# Altium PCB DexCon.PcbDoc
Units mil, origin at the board's own origin, x right, y up, seen from the top; angles counter-clockwise.
Board outline 4450 x 2204.55 mil, 4 copper layers (Top Layer, Int1 (GND), Int2 (PWR), Bottom Layer), stack 53.912 mil thick; 50 components, 35 nets, 178 pads, 53 vias.
Unrouted connection lines stored in the file: 9.
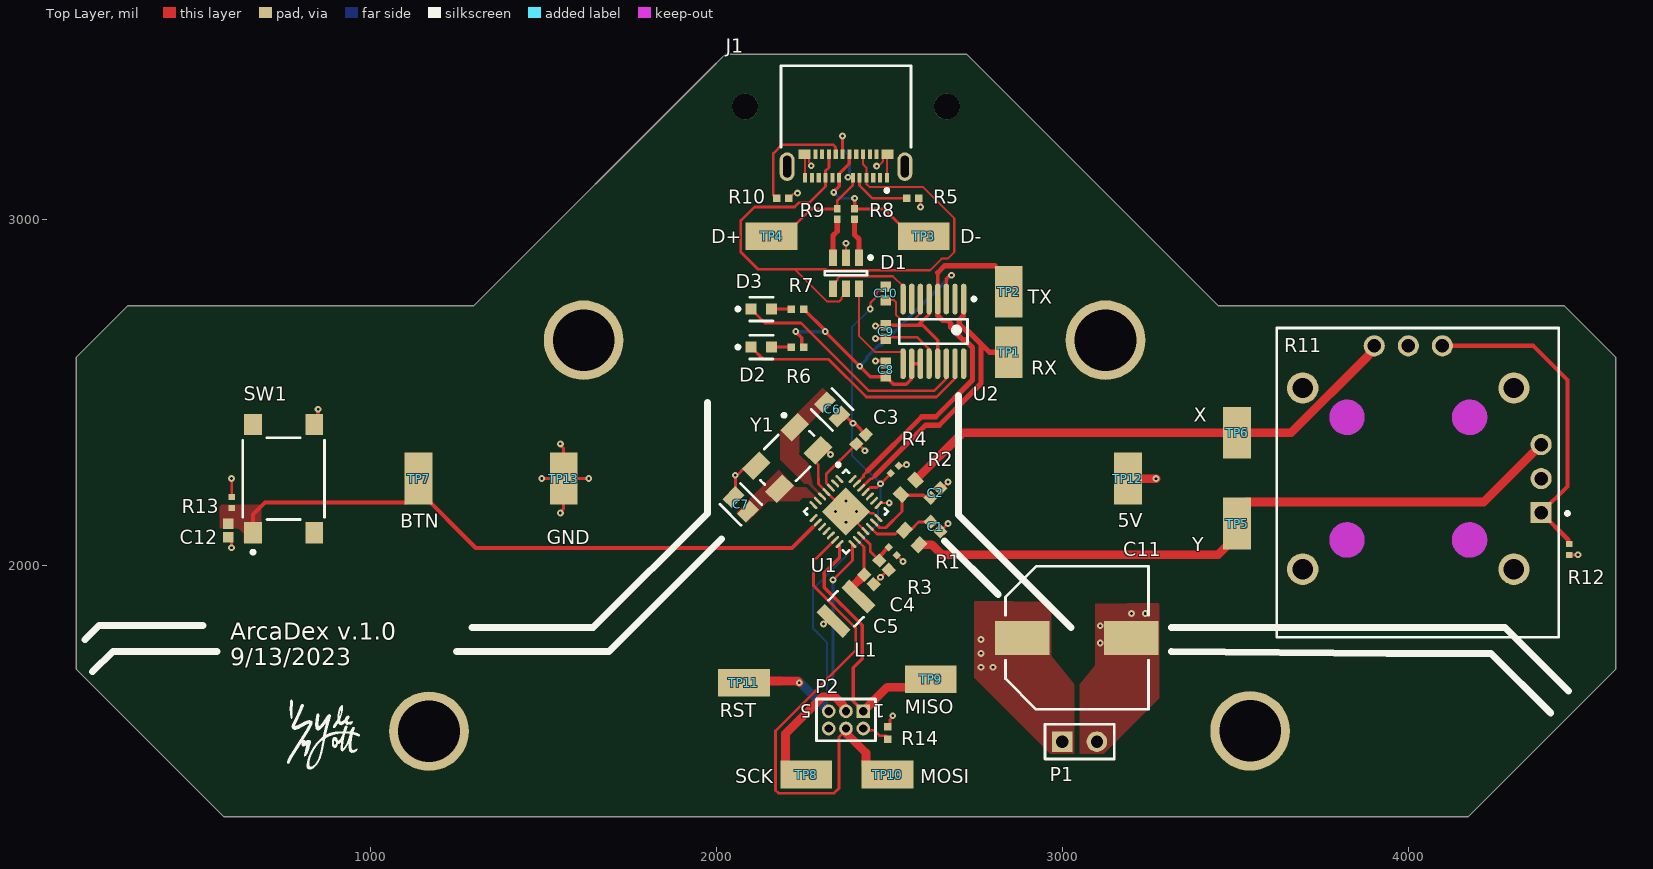
[diagram p0: Top Layer view]
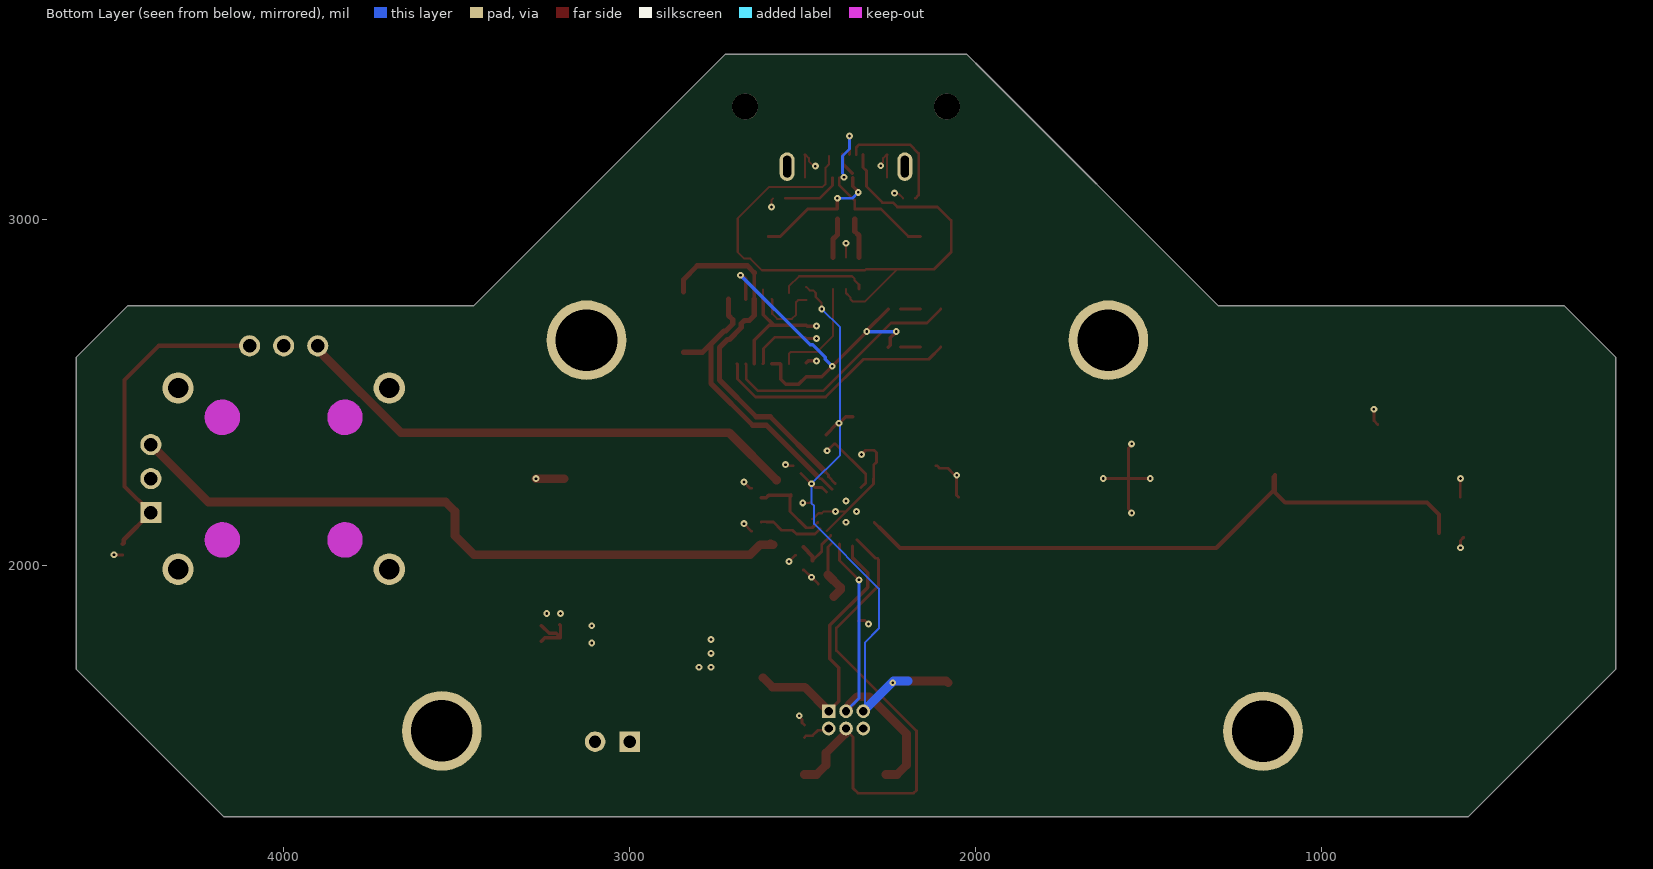
[diagram p1: Bottom Layer view, seen from below]
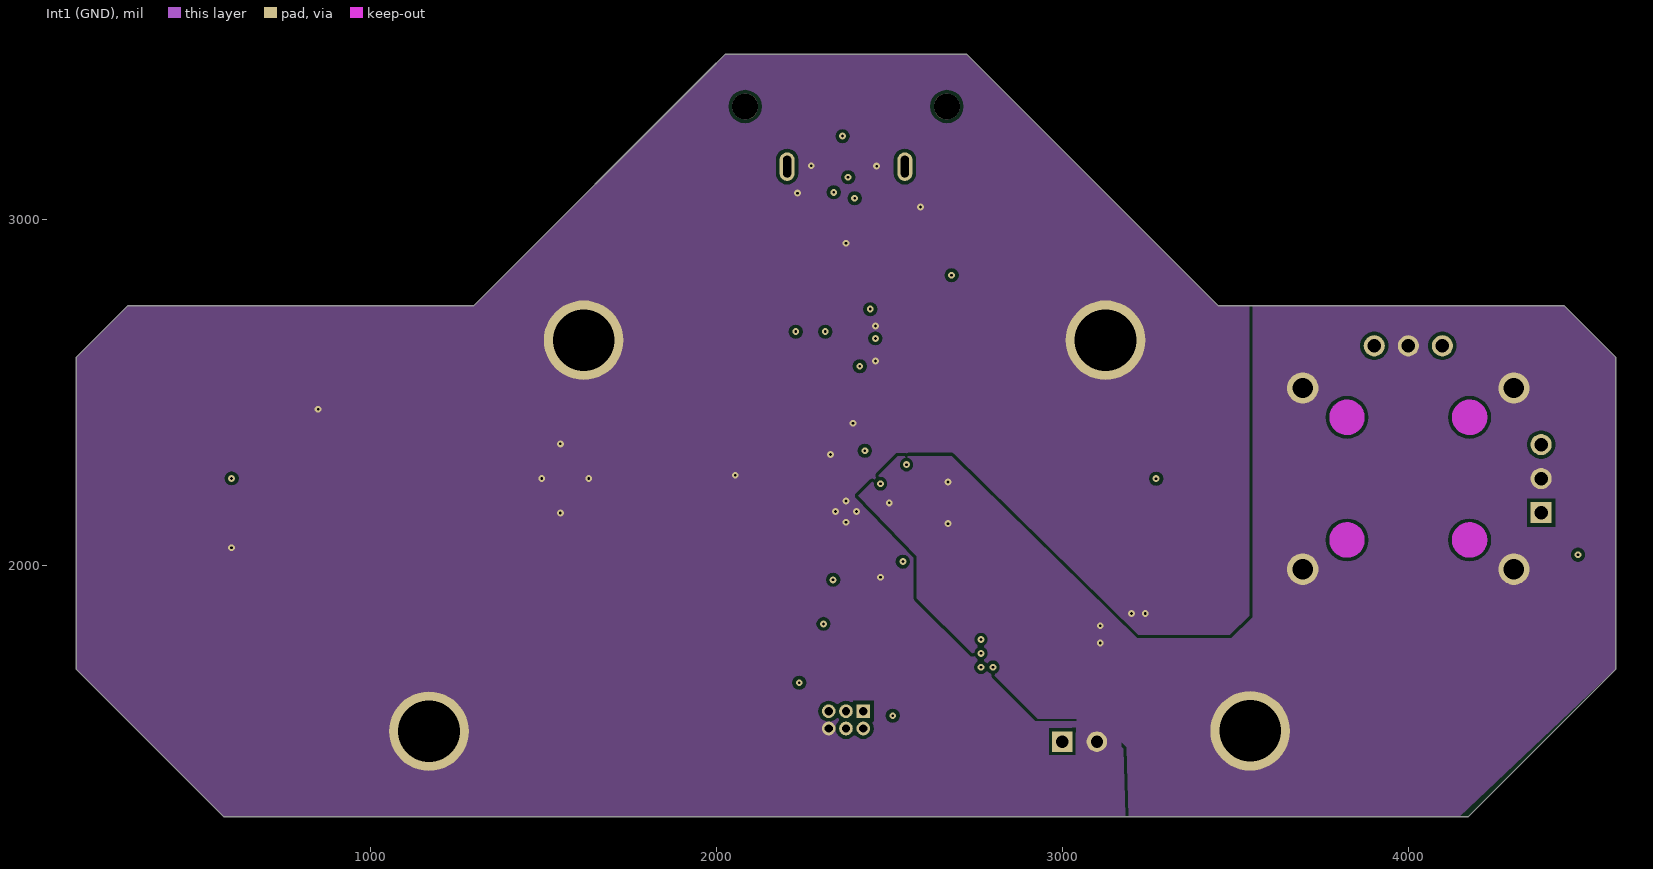
[diagram p2: Int1 (GND)]
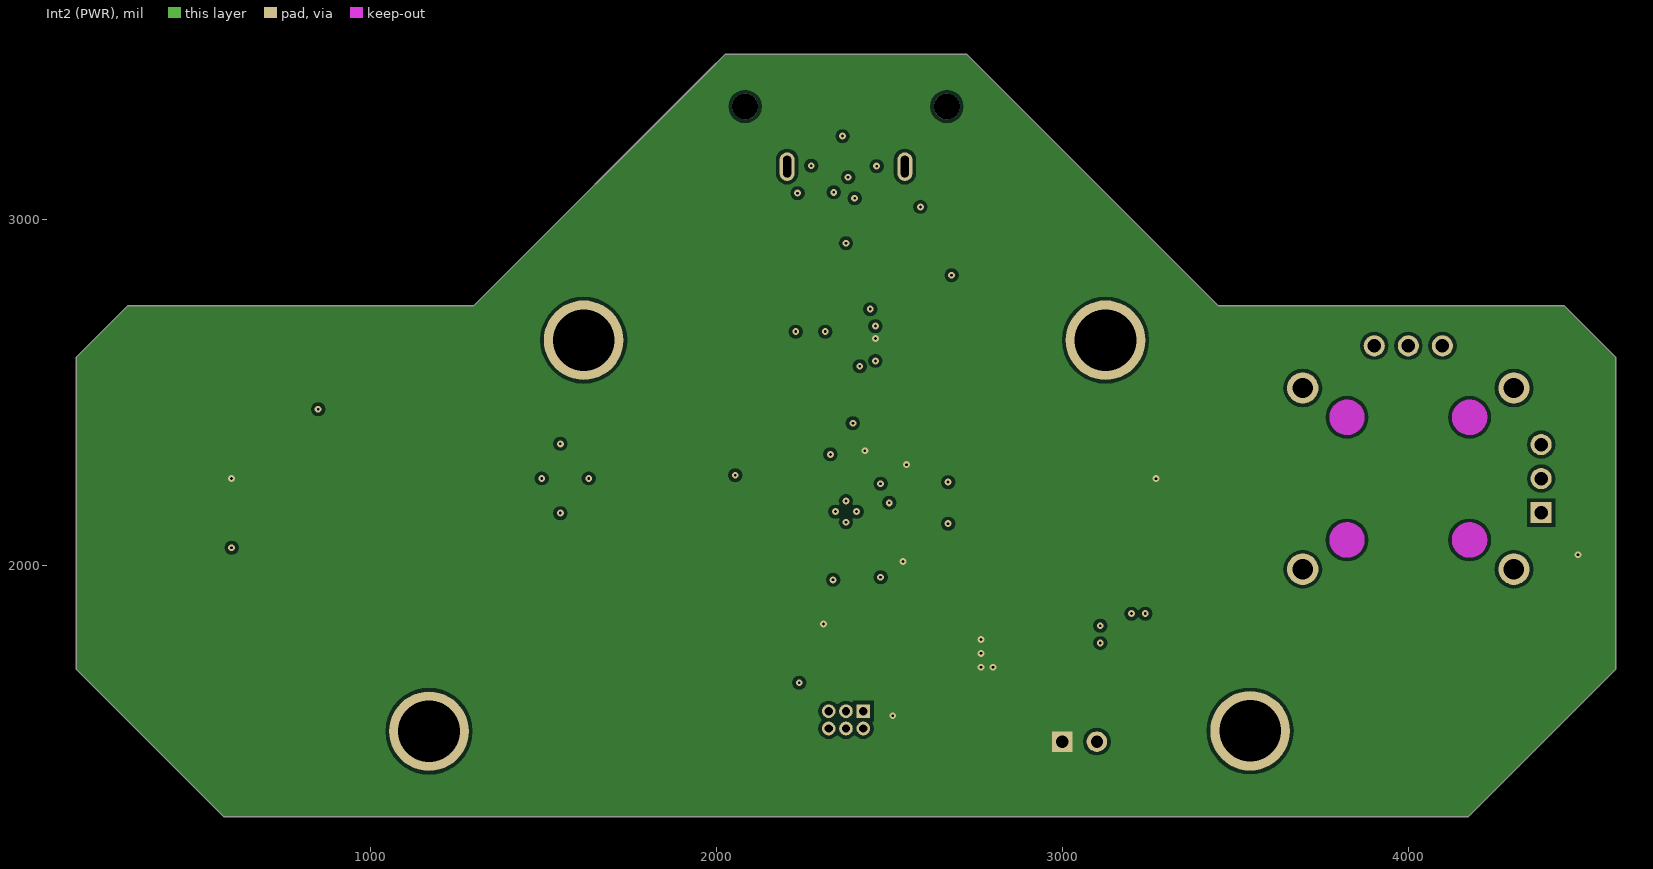
[diagram p3: Int2 (PWR)]

## Layer stack, top to bottom
Top Solder: solder mask 1, SM-001, Dk 4
Top Layer: signal copper 1.378
Dielectric 1: prepreg 5.1, PP-017, Dk 4.3
Dielectric 2: prepreg 5.1, PP-017, Dk 4.3
Int1 (GND): signal copper 1.378
Dielectric 3: core 28, Core-039, Dk 4.8
Int2 (PWR): signal copper 1.378
Dielectric 4: prepreg 5.1, PP-017, Dk 4.3
Dielectric 5: prepreg 5.1, PP-017, Dk 4.3
Bottom Layer: signal copper 1.378
Bottom Solder: solder mask 1, SM-001, Dk 4

## Board outline
150,1700.05 150,2600.05 300,2750.05 1300,2750.05 2000,3450.05 1999.5,3449.5 2027,3477 2723,3477 3450,2750 4450,2750 4600,2600 4600,1700 4172.45,1272.45 2375,1272.45 2375,1272.5 577.55,1272.5

## Design rules (kind name [scope] priority, off if disabled: settings)
Clearance [All] p1: gap=10 ignorepadtopadclearanceinfootprint=FALSE except(0: Arc-Hole Track-Hole SMDPad-Hole THPad-Hole Via-Hole Fill-Hole Poly-Hole Region-Hole Text-Hole)
DiffPairsRouting [All] p1: maxlimit=10 minlimit=10 mostfreqgap=10 toplayer_minwidth=8 toplayer_maxwidth=15 toplayer_prefwidth=15 midlayer1_minwidth=15 midlayer1_maxwidth=15 midlayer1_prefwidth=15 midlayer2_minwidth=15 midlayer2_maxwidth=15 midlayer2_prefwidth=15 bottomlayer_minwidth=8 bottomlayer_maxwidth=15 bottomlayer_prefwidth=15 maxuncoupledlength=500
PolygonConnect PolygonConnect_2 [All] p1: connectstyle=Direct reliefconductorwidth=10 reliefentries=4 polygonreliefangle="90 Angle" airgapwidth=10
PolygonConnect PolygonConnect_1 [All] p2: thpad.connectstyle=Direct thpad.reliefconductorwidth=10 thpad.reliefentries=4 thpad.polygonreliefangle="90 Angle" thpad.airgapwidth=10 smdpad.connectstyle=Direct smdpad.reliefconductorwidth=10 smdpad.reliefentries=4 smdpad.polygonreliefangle="90 Angle" smdpad.airgapwidth=10 via.connectstyle=Relief via.reliefconductorwidth=10 via.reliefentries=4 via.polygonreliefangle="90 Angle" via.airgapwidth=10
PolygonConnect [All] p3: connectstyle=Relief reliefconductorwidth=10 reliefentries=4 polygonreliefangle="90 Angle" airgapwidth=10
RoutingVias [All] p1: holewidth=28 width=50 viastyle="Through Hole" minholewidth=28 minwidth=50 maxholewidth=28 maxwidth=50
SolderMaskExpansion [All] p1: expansion=4 istentingtop=FALSE
Width [All] p1: maxlimit=200 minlimit=3.5 preferedwidth=10 midlayer1_minwidth=10 midlayer1_maxwidth=10 midlayer2_minwidth=10 midlayer2_maxwidth=10 minimp=50.000000 maximp=50.000000 favimp=50.000000
29 further rules are at their usual default settings.

## Classes and differential pairs
component class "PWR / IO": C11 C12 P1 R11 R12 R13 SW1 TP5 TP6 TP7 TP12 TP13
component class MCU: C1 C2 C3 C4 C5 C6 C7 L1 R1 R2 R3 R4 U1 Y1
component class INTERFACES: C8 C9 C10 D1 D2 D3 J1 P2 R5 R6 R7 R8 R9 R10 R14 TP1 TP2 TP3 TP4 TP8 TP9 TP10 TP11 U2
differential pair U: +U_P -U_N

## Components (designator, comment, footprint, x,y, rotation, side; value= is the part's Value field where it differs from the comment)
C1 "100nF" CAPC1005X56X25ML10T15 2633.64,2111.36 r315 top
C2 "100nF" CAPC1005X56X25ML10T15 2633.64,2208.64 r45 top
C3 "100nF" CAPC1005X56X25ML10T15 2418.64,2363.64 r225 top
C4 "100nF" CAPC1005X56X25ML10T15 2485,1999.77 r135 top
C5 "100nF" CAPC1005X56X25ML10T15 2441.36,1958.64 r315 top
C6 "C0805C220J5GACTU" FP-C0805C-DN-MFG 2335,2449.77 r315 top value="22 pF"
C7 "C0805C220J5GACTU" FP-C0805C-DN-MFG 2070.73,2175.65 r135 top value="22 pF"
C8 "100nF" CAPC1005X56X25ML10T15 2490,2565 r270 top
C9 "100nF" CAPC1005X56X25ML10T15 2490,2674 r270 top
C10 "100nF" CAPC1005X56X25ML10T15 2490,2785 r270 top
C11 "1000u" NIC-CAPA2-10X10_V 3042.52,1790 r0 top
C12 "100nF" CAPC1005X56X25ML10T15 590,2100 r270 top
D1 "USBLC6-2SC6" STM-SOT23-6L_V 2375,2843.5 r270 top
D2 "LTST-C190KGKT" FP-LTST-C190KGKT-MFG 2130.47,2630 r0 top
D3 "LTST-C190KGKT" FP-LTST-C190KGKT-MFG 2130.47,2740 r0 top
J1 "205714-1001" FP-205714-1001-MFG 2375,3276.08 r180 top
L1 "100uH" FP-CB3225-MFG 2375,1873.9 r45 top
P1 "Header 2" HDR1X2 3000,1490 r0 top
P2 "MHDR2X3" MHDR2X3 2425,1577.94 r180 top
R1 "1k" RESC1608X55X25ML10T15 2565,2079.77 r315 top
R2 "1k" RESC1608X55X25ML10T15 2555,2225 r45 top
R3 "10k" RESC1005X40X25LL05T05 2510,2040 r315 top
R4 "10k" RESC1005X40X25LL05T05 2516.14,2276.14 r225 top
R5 "5.11k" RESC1005X40X25NL05T05 2567.72,3060 r180 top
R6 "270" RESC1005X40X25NL05T05 2235,2630 r0 top
R7 "270" RESC1005X40X25NL05T05 2235,2740 r0 top
R8 "27" RESC1005X40X25LL10T10 2400,3014.76 r270 top
R9 "27" RESC1005X40X25LL10T10 2350,3014.76 r270 top
R10 "5.11k" RESC1005X40X25NL05T05 2192.28,3060 r180 top
R11 "RKJXK122000D" FP-RKJXK122000D-MFG 4000,2250 r0 top
R12 "10k" RESC1005X40X25LL05T05 4465,2045 r270 top
R13 "10k" RESC1005X40X25LL05T05 600,2180.75 r90 top
R14 "270" RESC1005X40X25NL05T05 2495,1515 r270 top
SW1 "PTS645SM43SMTR92LFS" FP-PTS645SM43SMTR92LFS-MFG 750,2250 r90 top
TP1 "5019" KSTN-5019_V 2845,2615 r270 top
TP2 "5019" KSTN-5019_V 2845,2790 r270 top
TP3 "5019" KSTN-5019_V 2600,2950 r0 top
TP4 "5019" KSTN-5019_V 2160,2950 r180 top
TP5 "5019" KSTN-5019_V 3505,2120 r90 top
TP6 "5019" KSTN-5019_V 3505,2382.28 r90 top
TP7 "5019" KSTN-5019_V 1139.86,2250 r90 top
TP8 "5019" KSTN-5019_V 2260,1395 r0 top
TP9 "5019" KSTN-5019_V 2620,1670 r0 top
TP10 "5019" KSTN-5019_V 2495,1395 r180 top
TP11 "5019" KSTN-5019_V 2080,1660 r180 top
TP12 "5019" KSTN-5019_V 3189.78,2250 r90 top
TP13 "5019" KSTN-5019_V 1559.06,2250 r90 top
U1 "ATmega328P-MMH" 28M1_N 2375,2154.77 r315 top
U2 "FT230XS-U" SSOP-16_N 2627.5,2675.5 r270 top
Y1 "ABM3B-16.000MHZ-10-1-U-T" FP-ABM3B-MFG 2205,2309.77 r225 top

## Footprints (in the part's own frame and the unit in brackets; to place one, negate y for a bottom-side part, rotate by r counter-clockwise, add the part's x,y. Pads: shape width x height; smd on the part's side, far side on the other; paste and mask are expansions set on the pad)
28M1_N [mm] "QFN, 28-Leads, Body 4x4mm, Pitch 0.45mm, Thermal Pad 2.5x2.5mm, IPC Medium Density"
  oval 0.75x0.2 smd: 1(-2.025,1.35) 2(-2.025,0.9) 3(-2.025,0.45) 4(-2.025,0) 5(-2.025,-0.45) 6(-2.025,-0.9) 7(-2.025,-1.35) 15(2.025,-1.35) 16(2.025,-0.9) 17(2.025,-0.45) 18(2.025,0) 19(2.025,0.45) 20(2.025,0.9) 21(2.025,1.35)
  oval 0.2x0.75 smd: 8(-1.35,-2.025) 9(-0.9,-2.025) 10(-0.45,-2.025) 11(0,-2.025) 12(0.45,-2.025) 13(0.9,-2.025) 14(1.35,-2.025) 22(1.35,2.025) 23(0.9,2.025) 24(0.45,2.025) 25(0,2.025) 26(-0.45,2.025) 27(-0.9,2.025) 28(-1.35,2.025)
  rect 2.5x2.5 smd: 29(0,0)
  silkscreen extent -2.95,-2.18 2.18,2.18, body extent -2.02,-2.02 2.02,2.02, height 1
CAPC1005X56X25ML10T15 [mm] "Chip Capacitor, 2-Leads, Body 1.00x0.50mm, IPC Low Density"
  rect 0.78x0.74 smd: 1(-0.49,0) 2(0.49,0)
  body extent -0.55,-0.3 0.55,0.3, height 0.56
FP-205714-1001-MFG [mm]
  rrect100% 1.1x2.1 hole 1.6 slot 0.6 at 0 deg paste-1000 mask+0: 1(-4.32,3.16) 2(4.32,3.16)
  rect 0.3x0.7 smd paste+0 mask+0: A1(-3,3.97) A2(-2.5,3.97) A3(-2,3.97) A4(-1.5,3.97) A5(-1,3.97) A6(-0.5,3.97) A7(0.5,3.97) A8(1,3.97) A9(1.5,3.97) A10(2,3.97) A11(2.5,3.97) A12(3,3.97) B2(2.25,2.27) B3(1.75,2.27) B4(1.25,2.27) B5(0.75,2.27) B6(0.25,2.27) B7(-0.25,2.27) B8(-0.75,2.27) B9(-1.25,2.27) B10(-1.75,2.27) B11(-2.25,2.27)
  rect 0.9x0.7 smd paste+0 mask+0: B1(3.05,2.27) B12(-3.05,2.27)
  round 1.9 hole 1.9 unplated paste-1000 mask+0: ""(-7.4,-1.25) ""(7.4,-1.25)
  silkscreen extent -4.77,-4.25 4.77,5.03, body extent -9,-4.35 9,4.42, height 0.25
FP-ABM3B-MFG [mm]
  rect 1.8x1.2 smd paste+0 mask+0: 1(-2,-1.2) 2(2,-1.2) 3(2,1.2) 4(-2,1.2)
  silkscreen extent -2.55,-2.5 2.55,1.65, body extent -3,-1.9 3,1.9, height 0.25
FP-C0805C-DN-MFG [mm]
  rect 0.95x1.35 smd paste+0 mask+0: 1(-0.75,0) 2(0.75,0)
  silkscreen extent -1.1,-1.07 1.1,1.07, body extent -1.4,-0.85 1.4,0.85, height 0.25
FP-CB3225-MFG [mm]
  rect 0.85x2.7 smd paste+0 mask+0: 1(-1.275,0) 2(1.275,0)
  silkscreen extent -0.47,-1.35 0.47,1.35, body extent -1.8,-1.45 1.8,1.45, height 0.25
FP-LTST-C190KGKT-MFG [mm]
  rect 0.8x0.8 smd paste+0 mask+0: 1(-0.75,0) 2(0.75,0)
  silkscreen extent -1.85,-0.87 0.85,0.87, body extent -1.25,-0.55 1.25,0.55, height 0.25
FP-PTS645SM43SMTR92LFS-MFG [mm]
  rect 1.55x1.3 smd paste+0 mask+0: 1(-3.975,2.25) 2(3.975,2.25) 3(-3.975,-2.25) 4(3.975,-2.25)
  silkscreen extent -5.52,-3 3,3, body extent -4.85,-3.1 4.85,3.1, height 0.25
FP-RKJXK122000D-MFG [mm]
  round 2.3 hole 1.5 paste-1000 mask+0: 1(-7.75,6.65) 2(7.75,6.65) 3(-7.75,-6.65) 4(7.75,-6.65)
  rect 1.55x1.55 hole 1 paste-1000 mask+0: 1_VR1(9.75,-2.5)
  round 1.55 hole 1 paste-1000 mask+0: 1_VR2(2.5,9.75) 2_VR1(9.75,0) 2_VR2(0,9.75) 3_VR1(9.75,2.5) 3_VR2(-2.5,9.75)
  Keep-Out Layer circle w1.3: c4.5,4.5 r0.65
  Keep-Out Layer circle w1.3: c4.5,-4.5 r0.65
  Keep-Out Layer circle w1.3: c-4.5,4.5 r0.65
  Keep-Out Layer circle w1.3: c-4.5,-4.5 r0.65
  silkscreen extent -9.65,-11.65 11.8,11.05, body extent -9.75,-11.75 11.15,11.15, height 0.25
HDR1X2 [mm] "Connector; Header; 2 Position"
  rect 1.5x1.5 hole 0.9: 1(0,0)
  round 1.5 hole 0.9: 2(2.54,0)
  silkscreen extent -1.27,-1.27 3.81,1.27
KSTN-5019_V [mm] "Test Point, 1-Leads, Body 3.81x2.03mm"
  rect 3.8x2.03 smd: 1(0,0)
  body extent -1.9,-1.01 1.9,1.02, height 2.29
MHDR2X3 [mm] "Connector; Header; 3x2 Position"
  rect 1x1 hole 0.6: 1(0,0)
  round 1 hole 0.6: 2(0,1.27) 3(1.27,0) 4(1.27,1.27) 5(2.54,0) 6(2.54,1.27)
  silkscreen extent -0.9,-0.9 3.44,2.17
NIC-CAPA2-10X10_V [mm] "Aluminum Electrolytic Capacitor, Diameter 10mm, Height 10.8mm, Pitch 8mm"
  rect 4x2.5 smd: 1(-4,0) 2(4,0)
  silkscreen extent -5.25,-5.25 5.25,5.25, body extent -4.96,-4.99 5,4.99, height 10.8
RESC1005X40X25LL05T05 [mm] "Chip Resistor, 2-Leads, Body 1.05x0.55mm, IPC High Density"
  rect 0.45x0.45 smd: 1(-0.4,0) 2(0.4,0)
  body extent -0.53,-0.28 0.53,0.28, height 0.4
RESC1005X40X25LL10T10 [mm] "Chip Resistor, 2-Leads, Body 1.00x0.50mm, IPC High Density"
  rect 0.55x0.5 smd: 1(-0.375,0) 2(0.375,0)
  body extent -0.55,-0.3 0.55,0.3, height 0.4
RESC1005X40X25NL05T05 [mm] "Chip Resistor, 2-Leads, Body 1.00x0.50mm, IPC Medium Density"
  rect 0.55x0.55 smd: 1(-0.45,0) 2(0.45,0)
  body extent -0.53,-0.27 0.53,0.28, height 0.4
RESC1608X55X25ML10T15 [mm] "Chip Resistor, 2-Leads, Body 1.60x0.80mm, IPC Low Density"
  rect 0.8x1 smd: 1(-0.75,0) 2(0.75,0)
  body extent -0.85,-0.45 0.85,0.45, height 0.55
SSOP-16_N [mm] "SOP, 16-Leads, Body 4.9x3.9mm, Pitch 0.635mm, IPC Medium Density"
  oval 2.25x0.4 smd: 1(-2.375,2.222) 2(-2.375,1.587) 3(-2.375,0.952) 4(-2.375,0.317) 5(-2.375,-0.318) 6(-2.375,-0.953) 7(-2.375,-1.588) 8(-2.375,-2.223) 9(2.375,-2.222) 10(2.375,-1.587) 11(2.375,-0.952) 12(2.375,-0.317) 13(2.375,0.318) 14(2.375,0.953) 15(2.375,1.588) 16(2.375,2.223)
  silkscreen extent -2.5,-2.5 0.9,3.1, body extent -1.99,-2.5 1.99,2.5, height 1.76
STM-SOT23-6L_V [mm] "SOT23, 6-Leads, Body 3.05x1.75mm, Pitch 0.95mm"
  rect 1.2x0.6 smd: 1(-1.15,0.95) 2(-1.15,0) 3(-1.15,-0.95) 4(1.15,-0.95) 5(1.15,0) 6(1.15,0.95)
  silkscreen extent -1.27,-1.55 0.15,1.93, body extent -1.6,-1.53 1.6,1.53, height 1.45

## Part data
C1 C2 C3 C4 C5 C8 C9 C10 C12: library part CMP-1034-02071-2, Manufacturer="AVX Interconnect / Elco", Part Number=0402YG104ZAT2A
C6 C7: library part CMP-2007-00048-2, "Capacitor; Ceramic; Cap; 22.0pF; Tol 5%; SMT; Vol-Rtg 50V; C0G; Tape and Reel", Capacitance="22 pF", Manufacturer=KEMET, Package=C0805C-DN, Temperature="-55°C to +125°C", Temperature Characteristic=C0G, Temperature Coefficient=30ppm/°C, Temperature Range High=+125°C, Temperature Range Low=-55°C, Tolerance=0.05, Voltage Rating="50 V", Automotive=No, Category=Cap, ComponentLink2Description=Datasheet, ComponentLink2URL=https://content.kemet.com/datasheets/KEM_C1003_C0G_SMD.pdf, Device Class L1="Passive Components", Device Class L2=Capacitors, Device Class L3="Ceramic Capacitors", Digikey Description="Capacitor; Ceramic; Cap; 22.0pF; Tol 5%; SMT; Vol-Rtg 50V; C0G; Tape and Reel", Height=0.88mm, Ipc Land Pattern Name=CAPC200125X78, Lead Free=Yes, Manufacturer Part Number=C0805C220J5GACTU, Material=Ceramic, Mouser Description="Multilayer Ceramic Capacitors MLCC - SMD/SMT 50volts 22pF C0G 5%", Octopart=https://octopart.com/c0805c220j5gactu-kemet-145470, RoHS=TRUE
C11: library part CMP-0687-00006-1, "Aluminum Electrolytic Capacitor, UD Series, Low Impedance, 1000 uF, 10 V, + / - 20%, -55 to 105 degC, Chip Type, 10 x 10 mm D x L, Pb-Free, Reel", Manufacturer=Nichicon, PartNumber=UUD1A102MNL1GS, Rated Capacitance="1000 uF", Rated Ripple Current (at 100kHz)="670 mA", Rated Voltage="10 V", Tolerance Rated Capacitance="-20 to 20%", ComponentLink1Description="Manufacturer URL", ComponentLink1URL=http://www.nichicon.co.jp/, ComponentLink2Description=Datasheet, ComponentLink2URL=http://products.nichicon.co.jp/en/pdf/XJA043/e-ud.pdf, ComponentLink3Description="Package Specification", ComponentLink3URL=http://products.nichicon.co.jp/en/pdf/XJA043/e-ud.pdf, DatasheetVersion=08/2012, Diameter="10 mm", Endurance Time="5000 h", Impedance="0.09 Ohm", Length="10 mm", Mounting Technology="Surface Mount", PackageDescription="2-Pin Surface Mount Device, Diameter 10 mm, Height 10 mm, Pitch 8 mm", PackageReference=CAPAE-D10H10, Packing="Dia382mm Reel", RoHS=TRUE
D1: library part CMP-2000-05378-1, "Very low capacitance ESD protection, 3.5 pF, -40 to 125 degC, 6-Pin SOT23, RoHS, Tape and Reel", Capacitance Value=3.5pF, Clamping Voltage=17V, Leakage Current=0.15uA, Manufacturer=STMicroelectronics, Operating Temp Range=-40Cto125C, Operating Temperature Classification=Automotive, Operating Temperature Max Deg. C=125C, Operating Temperature Min Deg. C=-40C, Package / Case=SOT-23, Package Description="6-Pin Small Outline Transistor, Body 2.925 x 1.625 mm, Pitch 0.95 mm", Package Reference=SOT23-6L, Peak Pulse Current=5A, Reverse Breakdown Voltage=6V, Reverse Stand-off Voltage=5V, Test Current (It)=1mA, Clamping Voltage (Max)=17V, Configuration=Dual, Datasheet URL=http://www.st.com/st-web-ui/static/active/en/resource/technical/document/datasheet/CD00050750.pdf, Datasheet Version="Rev. 5, 10/2011", Direction Type=Uni-Directional, Leakage Current (Max)=0.15uA, Manufacturer URL=http://www.st.com/, Mounting=SurfaceMount, Mounting Style=SurfaceMount, Number of Elements=1, Packaging=TapeandReel, Pin Count=6, Polarity=Uni-Directional, Product Depth (mm)=1.75mm, Product Height (mm)=1.3mm, Product Length (mm)=3.05mm, Rad Hardened=No, Suppressor Type=DiodeArrays, Working Voltage=5V, Working Voltage (Max)=5V
D2 D3: library part CMP-2000-05197-2, "LED GREEN CLEAR CHIP SMD", Case Code (Imperial)=0603, Case Code (Metric)=1608, Color=Green, Forward Current=30mA, Forward Voltage=2V, Lens Color=Colorless, Max Operating Temperature=85°C, Min Operating Temperature=-55°C, Package Quantity=1, Power Dissipation=75mW, Reverse Voltage=5V, Test Current=20mA, Case/Package=0603, Depth=0.8mm, Dominant Wavelength=571nm, Height=0.8mm, Illumination Color=Green, Lead Free="Lead Free", Length=1.6mm, Lens Style=Diffused, Lens Transparency=Clear, Luminous Intensity=35mcd, Mount="Surface Mount", Number of Elements=1, Number of LEDs=1, Number of Pins=2, Packaging="Tape and Reel", Power Rating=75mW, Radiation Hardening=No, Viewing Angle=130°, Wavelength=574nm, Width=0.8mm
J1: library part CMP-04767-000031-1, "USB TYPE C WITH SCREW HOLE  GM"
L1: library part CMP-14484-000373-1, "SMD Inductors 100uH ±20% 0.34A 1.82Ω 1210", Case Code (Imperial)=1210, Case Code (Metric)=3225, Current Rating=340mA, DC Resistance (DCR)=1.82R, Inductance Tolerance=20%, Inductor Type=POWER, Max Operating Temperature=105°C, Min Operating Temperature=-40°C, Package Quantity=1000, Resistance=1.4R, Resistor Type=Wirewound, Saturation Current=270mA, Self Resonant Frequency=6MHz, Test Frequency=100kHz, Case/Package=1210, Core Material=Ferrite, DC Current=340mA, Depth=2.7mm, Halogen Free="Halogen Free", Height=2.5mm, Height - Seated (Max)=0.106inch, Inductance=100uH, Lead Free="Lead Free", Length=0.126inch, Max DC Current=340mA, Military Standard=Not, Mount="Surface Mount", Number of Pins=2, Packaging="Tape and Reel", Radiation Hardening=No, RoHS Compliant=Yes, Series=CB, Shielding=Unshielded, Termination=SMD/SMT, Tolerance=20%, Width=0.098inch
P1: "Header, 2-Pin", LatestRevisionDate=17-Jul-2002, LatestRevisionNote="Re-released for DXP Platform.", Publisher="Altium Limited"
P2: "Header, 3-Pin, Dual row", LatestRevisionDate=17-Jul-2002, LatestRevisionNote="Re-released for DXP Platform.", Publisher="Altium Limited"
R1 R2: library part CMP-2000-04525-1, Manufacturer=Yageo, Part Number=RT0603BRE071KL
R3 R4 R12 R13: library part CMP-2000-07588-1, "Chip Resistor, 10 KOhm, +/- 1%, 0.1 W, -55 to 155 degC, 0402 (1005 Metric), RoHS, Tape and Reel", Case Code (Imperial)=0402, Case Code (Metric)=1005, Manufacturer=Panasonic, Max Operating Temperature=155degC, Max Power Dissipation=100mW, Min Operating Temperature=-55degC, Package Description="2-Pin Surface Mount Device, Body 1 x 0.5 mm", Package Quantity=1, Package Reference=402, Resistance=10KOhm, Temperature Coefficient=100ppm\/degreesC, Tolerance=1%, Voltage Rating=50V, Case\/Package=0402, Composition=ThickFilm, Contact Plating=Tin, Datasheet URL=https://industrial.panasonic.com/cdbs/www-data/pdf/RDA0000/AOA0000C304.pdf, Datasheet Version=02/2017, Depth=0.5mm, Height=0.35mm, Lead Free=LeadFree, Length=1mm, Manufacturer URL=http://www.panasonic.com/, Military Standard=Not, Mount=SurfaceMount, Mounting Technology=SurfaceMount, Number of Pins=2, Number of Terminations=2, Packaging=TapeandReel, Power Rating=100mW, Radiation Hardening=No, REACH SVHC=NoSVHC, RoHSCompliant=True, Termination=SMD/SMT, Voltage Rating (DC)=50V, Width=0.02inch
R5 R10: library part CMP-2002-00974-1, Manufacturer=Panasonic, Part Number=ERJ-2RKF5111X
R6 R7 R14: library part CMP-1011-00444-2, Manufacturer=Panasonic, Part Number=ERJ2RKF2700X
R8 R9: library part CMP-2002-03638-1, Manufacturer="KOA Speer", Part Number=RK73B1ETTP270J
R11: library part CMP-24118-000003-1, "ALPS NAVIGATION SWITCH, RESISTIVE, PCB", Current Rating=50mA, Insulation Resistance=100MR, Max Operating Temperature=70°C, Min Operating Temperature=-10°C, Operating Force=5.2N, Package Quantity=10, Power Rating=12.5mW, Resistance=10kR, Resistor Type=Potentiometer, Depth=20.7mm, Height=12.9mm, Lead Free="Lead Free", Length=16mm, Life (Hours)=100Hour, Military Standard=Not, Mount="Through Hole", Packaging=Tray, Radiation Hardening=No, RoHS Compliant=Yes, Series="RKJXV/ RKJXK", Termination=Pin, Type=Potentiometer, Width=16mm
SW1: library part CMP-2000-05160-2, "SWITCH TACTILE SPST-NO 0.05A 12V", Case/Package=SMD/SMT, Color=Black, Contact Resistance=100mR, Current Rating=50mA, Max Operating Temperature=60°C, Max Voltage Rating (DC)=12V, Min Operating Temperature=-20°C, Operating Force=160gf, Package Quantity=1, Actuator Length=0.85mm, Actuator Material=Nylon, Actuator Type=Standard, Contact Material=Silver, Contact Plating=Silver, Depth=9mm, Illumination Type=Non-Illuminated, Lead Free="Lead Free", Length=6mm, Max Current Rating=50mA, Mechanical Life=100000Cycles, Mount="Surface Mount", Orientation=Straight, Packaging="Tape and Reel", REACH SVHC="No SVHC", Switch Function=Off-Mom, Termination="Gull Wing", Throw Configuration=SPST, Voltage Rating (DC)=12V
TP1 TP2 TP3 TP4 TP5 TP6 TP7 TP8 TP9 TP10 TP11 TP12 TP13: library part CMP-1672-00008-1, "Test Point, 1 Position SMD, RoHS, Tape and Reel", Package Quantity=1000, ComponentLink1Description="Manufacturer URL", ComponentLink1URL=http://www.keyelco.com/, ComponentLink2Description=Datasheet, ComponentLink2URL=http://www.keyelco.com/product-pdf.cfm?p=1357, Contact Plating=Silver, DatasheetVersion=03/2014, Mount="Surface Mount", Mounting Technology="Surface Mount", PackageDescription="1-Pin Surface Mount Device, Body 3.81 x 2.03 mm", PackageReference=5019, Packaging="Tape and Reel", Pins=1, RoHSCompliant=True
U1: library part CMP-0095-00378-1, "8-bit AVR Microcontroller, 32KB Flash, 1KB EEPROM, 2KB SRAM, 28-pin VQFN, Industrial Grade (-40°C to 85°C)", ComponentLink1Description="Manufacturer URL", ComponentLink1URL=http://www.atmel.com/, ComponentLink2Description="ATmega48A/48PA/88A/88PA/168A/168PA/328/328P Datasheet", ComponentLink2URL=http://www.atmel.com/dyn/resources/prod_documents/8271.pdf, ComponentLink3Description="ATmega48A/48PA/88A/88PA/168A/168PA/328/328P Summary", ComponentLink3URL=http://www.atmel.com/dyn/resources/prod_documents/8271S.pdf, DatasheetVersion="revD, May-2011", PackageDescription="28-pad, 4x4x1.0mm Body, Pitch 0.45mm, 2.4x2.4mm Exposed Pad, Plastic Very Thin QFN Package (VQFN)", PackageReference=28M1, PackageVersion="revB, Nov-2008"
U2: library part CMP-0248-00025-2, "USB to Basic UART Interface Chip, UHCI/OHCI/EHCI Compatible, USB 2.0 Compatible, -40 to +85 degC, 16-Pin SSOP, Pb-Free, Tube", Manufacturer=FTDI, Code_JEDEC=MO-137-AB, ComponentLink1Description="Manufacturer URL", ComponentLink1URL=http://www.ftdichip.com/, ComponentLink2Description=Datasheet, ComponentLink2URL=http://www.ftdichip.com/Support/Documents/DataSheets/ICs/DS_FT230X.pdf, ComponentLink3Description="FT230X Product Page", ComponentLink3URL=www.ftdichip.com/Products/ICs/FT230X.html, DatasheetVersion="ver 1.2, Feb-2013", PackageDescription="16-Pin Small Outline Package, 8.6 x 3.9 mm Body, 0.635 mm Pitch", PackageReference=SSOP-16, PackageVersion=Feb-13, PartNumber=FT230XS-U, RevisionNote="DatasheetVersion updated to 1.2 Feb-2013"
Y1: library part CMP-27762-009701-1, "Crystal 16MHz ±10ppm 10pF SMD-4 5mm x 3.2mm", Case/Package=CSMD, ESR (Equivalent Series Resistance)=50R, Frequency=16MHz, Frequency Stability=10ppm, Load Capacitance=10pF, Max Operating Temperature=60°C, Min Operating Temperature=-10°C, Operating Frequency="16 MHz", Package Quantity=1000, Resistor Type=Ceramic, Depth=3.2mm, Frequency Tolerance=10ppm, Height=0.043inch, Lead Free="Lead Free", Length=5mm, Mount="Surface Mount", Number of Pins=4, Packaging="Tape and Reel", REACH SVHC="No SVHC", Series=ABM3B, Series Resistance=50R, Termination=SMD/SMT, Tolerance=10ppm, Width=3.2mm

## Free pads (board coordinates)
  round 230 hole 178: 1(1170,1520) 1(1617,2650) 1(3125,2650) 1(3542.84,1521)

## Via types
v1: diameter 19.68, hole 7.87, Top Layer to Bottom Layer, 53 vias

## Nets (pads, with @x,y where several pads share a name; then routed paths per layer and width w, separated by ;. In a path a pad name is that pad's centre, name@x,y a point inside that pad or via, vN(x,y) a via of type N, cw(c..) or ccw(c..) an arc to the next point about the centre after c; other vN are vias at no path point)
3V3_IO: C8.2 R6.2 R7.2 U2.3 U2.10 U2.11 | length 1072.9
  Top Layer w10: v1(2230,2675) 2230,2673.65 2246.89,2656.76 2246.89,2635.83 R6.2 ; R7.2 2313.15,2679.57 2313.15,2676.85 v1(2315,2675) v1(2415,2575) 2445.08,2544.92 2490,2544.92 2512.22,2522.7 2549.47,2522.7 2563.9,2537.13 2563.9,2580.89 U2.10 U2.11 ; U2.3 2665,2827.33 2673.48,2835.8 2678.15,2835.8 v1(2680,2837.66)
  Bottom Layer w10: v1(2230,2675) v1(2315,2675) ; v1(2415,2575) 2435.16,2595.16 2435.16,2600.29 2471.18,2636.31 2478.65,2636.31 v1(2680,2837.66)
5V: C3.2 C9.2 C11.1 L1.1 P1.1 R3.2 R4.1 R12.2 R13.2 R14.1 TP12.1 U1.3 U2.12 | length 691.6
  Top Layer w8: v1(599.58,2250.42) 599.79,2250.21 599.79,2196.71 R13.2 ; v1(2310,1830) 2319.95,1839.95 2337.96,1839.95 L1.1 ; U1.3@2331.47,2223.98 2318.09,2237.37 2318.09,2263.09 C3.2 2410,2350 v1(2429.58,2330.42) ; v1(2460,2655) 2489.71,2655 C9.2 2493.57,2658.28 2581.21,2658.28 2613.52,2625.98 2613.52,2583.47 U2.12 ; R14.1@2495,1537.72 2501.83,1544.54 2501.83,1553.66 2510,1561.84 v1(2510,1565) ; R3.2 v1(2539.58,2010.42) ; R4.1 2543.27,2287.27 2546.42,2290.42 v1(2549.58,2290.42) ; R12.2 4465.37,2029.63 4489.63,2029.63 v1(4490,2030)
  Top Layer w25: TP12.1 v1(3271.15,2250)
  other v1: 2765,1705 2800,1705 2765,1745 2765,1785
5V_USB: D1.5 J1.A4 J1.A9 J1.B4 J1.B9 | length 1820
  Top Layer w6: 2120.44,2855 2228.5,2855 2317.56,2855 2320.4,2852.15 2618.16,2852.15 2651.51,2885.5 2668.65,2885.5 2687.8,2904.65 2687.8,3002.2 2597,3093 2442.45,3093 2434.83,3100.61 2434.83,3119 J1.A4 2434.06,3148.71 2424.21,3158.55 J1.B9@2424.21,3181.91 ; 2228.5,2853.5 2320.4,2761.6 2354.79,2761.6 2362.41,2769.22 2362.41,2773.82 2375,2786.41 D1.5
  Top Layer w8: 2120.44,2855 2071.2,2904.24 2071.2,2995.76 2110.61,3035.17 2226.63,3035.17 2238.98,3047.53 2269.47,3047.53 2315.94,3094 J1.A9 2315.94,3136.82 2316.17,3137.04 2316.17,3139.8 2325.79,3149.42 J1.B4
CTS: C10.2 U2.6 | length 191.3
  Top Layer w6: C10.2 2513.57,2765.71 2519.13,2760.15 2519.13,2723.94 2531.35,2711.71 2573.65,2711.71 2588.13,2726.2 2588.13,2767.13 U2.6
GND: C1.2 C2.2 C3.1 C4.1 C5.2 C6.2 C7.2 C8.1 C9.1 C11.2 C12.2 D1.2 J1.A1 J1.A12 J1.B1 J1.B12 P1.2 P2.6 pad.1 R5.1 R10.1 R11.1 R11.2 R11.2_VR1 R11.2_VR2 R11.3 R11.4 SW1.4 TP13.1 U1.4 U1.18 U1.21 U1.22 U1.29 U2.5 U2.13 Y1.2 Y1.4 | length 2176.3
  Top Layer w6: R10.1 2222.38,3072.38 2232.38,3072.38 v1(2235,3075) ; J1.A12 2256.89,3184.74 J1.B1 2256.73,3186.71 2267.51,3175.93 2267.51,3166.19 2268.13,3165.57 2268.13,3164.21 2274.68,3157.66 v1(2274.68,3153.96) ; D1.2 v1(2375,2929.98) ; U1.18 U1.29 2440.35,2154.77 2445.12,2150 2454.42,2150 2468.45,2135.98 U1.21 2471.85,2133.08 U1.21@2473.08,2133.08 ; v1(2463.58,3153.01) 2466.2,3155.62 2470.57,3155.62 2482.49,3167.54 2482.49,3175.93 2493.27,3186.71 J1.B12 2493.11,3184.74 J1.A1 ; U1.22 2476.25,2180.86 2479.14,2180.86 2480,2180 v1(2500,2180) ; R5.1 2590,3055.43 v1(2590,3035) ; U2.5 U2.5@2615,2797
  Top Layer w8: C12.2 599.58,2071.13 v1(599.58,2050.42) ; SW1.4 849.58,2417.49 v1(849.58,2450.42) ; v1(1495.6,2250.42) 1512.9,2250.42 1513.32,2250 TP13.1 ; v1(1549.58,2150.42) 1550,2150 1550,2154 1559.06,2163.06 TP13.1 ; v1(1549.58,2350.42) 1549.58,2347.26 1559.06,2337.77 TP13.1 ; v1(1631.77,2250.42) 1559.48,2250.42 TP13.1 ; C7.2 2055.42,2202.09 2055.42,2259.58 v1(2055,2260) 2057.24,2262.24 2062.91,2262.24 2080.67,2280 2105,2280 2112.5,2287.5 Y1.2 ; v1(2330,2320) 2317.96,2332.04 Y1.4 2287.19,2325.15 2287.19,2297.4 2295,2289.59 2295,2250.18 2295.18,2250 2295.18,2234.59 U1.4 U1.29 ; C5.2 v1(2475,1965) 2496.13,1986.13 C4.1 ; C1.2 2647.72,2097.72 v1(2670,2120) ; C2.2 2652.28,2222.28 v1(2670,2240)
  Top Layer w10: C6.2 2356.31,2429.32 2375.68,2429.32 v1(2395,2410) 2396.85,2408.15 2401.42,2408.15 C3.1 ; v1(2459.97,2690.81) 2487.52,2690.81 C9.1 2583.06,2693.29 ; v1(2460,2590) 2484.29,2590 C8.1 ; U2.5 2613.9,2767.9 2613.9,2724.13 2583.06,2693.29 ; U2.13 2640,2650 2596.71,2693.29 2583.06,2693.29 ; C11.2@3202.5,1827.5 3200,1825 C11.2 ; C11.2@3255,1780 3245,1790 C11.2 ; C11.2@3255,1825 3232.66,1802.66 3212.66,1802.66 C11.2
  other v1: 3110,1775 3110,1825 3200,1860 3240,1860 2375,2124.14 2344.38,2154.77 2405.62,2154.77 2375,2185.39
MISO: P2.1 TP9.1 U1.14 | length 793.1
  Top Layer w10: 2356.21,2055 2356.21,2021.21 2312.72,1977.72 2312.72,1935.52 2421.92,1826.32 2421.92,1729.42 2396.17,1703.67 2396.17,1606.77 P2.1
  Top Layer w25: P2.1 2494.6,1647.54 2587.54,1647.54 TP9.1@2615,1675
MOSI: P2.4 TP10.1 U1.13 | length 1476.9
  Top Layer w8: U1.13 2343.37,2073.34 2290.03,2020 2284.69,2020 2280.91,2016.22 2280.91,1940.47 2402.92,1818.45 2402.92,1753 2171.2,1521.27 2171.2,1349.24 2179.4,1341.04 2340.6,1341.04 2354.8,1355.24 2354.8,1503.33 2375,1523.53 P2.4
  Top Layer w25: P2.4 2377.75,1525.19 2377.75,1512.25 2432.7,1457.3 2432.7,1422.46 2460.16,1395 TP10.1
NetC1_1: C1.1 R1.1 U1.19 | length 191.2
  Top Layer w8: U1.19@2450,2105 2465,2090 2518.38,2090 2529.03,2100.65 2560.74,2100.65 2585.09,2125 2603.94,2125 2604.5,2125.56 2619.44,2125.56 C1.1
NetC2_1: C2.1 R2.1 U1.20 | length 246.7
  Top Layer w8: U1.20 2456.55,2123.45 2457,2123 2457.46,2123 2472.46,2108 2490,2108 2536.9,2154.9 2536.9,2196.1 2534.12,2198.89 R2.1
  Top Layer w10: R2.1@2534.12,2198.89 2536.57,2201.34 2599.02,2201.34 2605.91,2194.44 2619.44,2194.44 C2.1
NetC4_2: C4.2 R3.1 U1.17 | length 143.6
  Top Layer w8: U1.17@2418.89,2085.91 2445.16,2059.64 2445.16,2039.84 2471.36,2013.64 C4.2
  Top Layer w12: C4.2@2471.36,2013.64 2471.36,2025.43 R3.1@2497.96,2052.04
NetC5_1: C5.1 L1.2 U1.16 | length 181.5
  Top Layer w8: 2416.61,2062.73 2427.16,2052.18 2427.16,1972.84 C5.1
  Top Layer w25: L1.2 2390.66,1929.23 2390.66,1935.22 C5.1
NetC12_1: C12.1 R13.1 SW1.1 TP7.1 U1.9 | length 1902.1
  Top Layer w8: 2278.51,2109.05 2278.86,2109.05 2293.26,2123.45 U1.9
  Top Layer w12: SW1.1 661.42,2146.42 696.2,2181.2 1105.9,2181.2 1135,2210.3 1135,2260 1139.86,2255.14 TP7.1 1139.86,2215.16 1305.01,2050 2219.46,2050 2278.51,2109.05
NetD1_1: D1.1 R8.2 | length 116.4
  Top Layer w15: R8.2 2400,2954.83 2412.4,2942.43 D1.1
NetD1_3: D1.3 R9.2 | length 116.4
  Top Layer w15: D1.3 2337.6,2952.6 2350,2965 R9.2
NetD1_4: D1.4 U2.8 | length 257.6
  Top Layer w6: D1.4@2337.6,2810.04 2350.19,2822.63 2350.19,2827.23 2357.8,2834.85 2510.57,2834.85 2540,2805.42 U2.8@2540,2787.21
  Top Layer w8: D1.4 D1.4@2337.6,2810.04
NetD1_6: D1.6 U2.9 | length 313.6
  Top Layer w6: D1.6 2412.4,2662.6 2459.59,2615.41 2535.5,2615.41 2540,2610.91 U2.9
NetD2_1: D2.1 U2.15 | length 713.8
  Top Layer w8: D2.1 2135.94,2595 2324.54,2595 2433.84,2485.7 2636.52,2485.7 2688.52,2537.7 2688.52,2580.51 U2.15
NetD2_2: D2.2 R6.1 | length 57.3
  Top Layer w8: D2.2 R6.1
NetD3_1: D3.1 U2.14 | length 719.2
  Top Layer w8: D3.1 2140.94,2700 2245,2700 2441.3,2503.7 2629.06,2503.7 2663.52,2538.16 2663.52,2580.51 U2.14
NetD3_2: D3.2 R7.1 | length 57.3
  Top Layer w8: D3.2 R7.1
NetJ1_A5: J1.A5 R5.2 | length 173.7
  Top Layer w8: J1.A5 2414.37,3097.04 2451.41,3060 R5.2
NetJ1_B5: J1.B5 R10.2 | length 348.1
  Top Layer w8: R10.2 2165,3069.57 2165,3190 2190,3215 2336.98,3215 2345.47,3206.51 J1.B5
NetP2_2: P2.2 R14.2 | length 80.6
  Top Layer w8: P2.2 2430.27,1522.67 2456.69,1522.67 2472.17,1507.18 2490.1,1507.18 R14.2@2495,1502.28
NetR1_2: R1.2 R11.3_VR1 TP5.1 | length 1985
  Top Layer w25: R1.2 2590.47,2058.89 2593.26,2061.67 2596.04,2058.89 2623.31,2058.89 2652.2,2030 3449.84,2030 3505,2085.16 3505,2154.84 3532.46,2182.3 4217.74,2182.3 R11.3_VR1
NetR2_2: R2.2 R11.3_VR2 TP6.1 | length 1493
  Top Layer w25: R2.2 2712.28,2382.28 TP6.1 3661.2,2382.28 3884.09,2605.16 3884.09,2606.62 3901.57,2624.11 R11.3_VR2
NetR11_1_VR1: R11.1_VR1 R11.1_VR2 R12.1 | length 941.9
  Top Layer w12: R11.1_VR2 4361.14,2633.86 4460,2535 4460,2227.72 R11.1_VR1 4462.14,2073.29 4462.14,2063.61 R12.1
NetU1_12: U1.12
RST: C10.1 P2.5 R4.2 TP11.1 U1.25 | length 1823
  Top Layer w6: v1(2445,2740) 2446.28,2741.28 2446.28,2758.84 2462.43,2775 2462.43,2786.45 2470.05,2794.06 2479.77,2794.06 C10.1
  Top Layer w8: U1.25@2431.37,2211.23 2431.37,2211.37 2442,2222 2442.94,2222 ; 2445.24,2224.21 2464.21,2224.21 v1(2475,2235) R4.2
  Top Layer w25: TP11.1 2085,1665 2235,1665 v1(2240,1660)
  Bottom Layer w6: P2.5 2320.57,1582.38 2320.57,1776.23 2280,1816.8 2280,1932.17 2467.16,2119.33 2467.16,2171.39 2475,2179.23 v1(2475,2235) 2392.16,2317.84 2392.16,2687.16 v1(2445,2740)
  Bottom Layer w25: 2195,1665 2237.94,1665 2241.47,1661.47 P2.5@2320.57,1582.38
SCK: P2.3 TP8.1 U1.15 | length 929.7
  Top Layer w8: v1(2337.57,1957.43) 2393.79,2013.66 U1.15
  Top Layer w25: TP8.1 2227.46,1395 2200,1422.46 2200,1512.6 2307.53,1620.13 2342.47,1620.13 2367.19,1595.42 2367.19,1589.65 2375,1581.83 P2.3
  Bottom Layer w8: v1(2337.57,1957.43) 2337.57,1615.38 P2.3
  Bottom Layer w25: P2.3 P2.3@2375,1581.83
U_N: TP1.1 U1.26 U2.1 | length 845.2
  Top Layer w8: U1.26@2415,2219.42 2445.35,2249.77 2450.12,2249.77 2460.18,2259.82
  Top Layer w15: 2460.18,2259.82 2604.43,2404.07 2644.74,2404.07 2765.37,2524.71 2765.37,2639.28 ; U2.1 2715,2721.7 2702.5,2709.2 2702.5,2696.77 2722.41,2676.86 2727.79,2676.86 2765.37,2639.28 ; TP1.1 2789.65,2615 2765.37,2639.28
U_P: TP2.1 U1.27 U2.4 | length 1088.9
  Top Layer w8: U1.27@2406.32,2236.51 U1.27 2425.71,2255.59 2425.71,2260.71 2437.5,2272.5
  Top Layer w10: U2.4 2640,2845
  Top Layer w15: 2437.5,2272.5 2594.07,2429.07 2634.38,2429.07 2740.37,2535.06 2740.37,2628.92 2717.43,2651.86 2712.05,2651.86 2677.5,2686.42 2677.5,2698.42 2668.71,2707.21 2654.49,2707.21 2640,2721.7 U2.4 ; 2640,2845 2660,2865 2804.84,2865 2845,2824.84 TP2.1
USB_N: J1.A7 J1.B7 R8.1 TP3.1 | length 446.2
  Top Layer w8: R8.1 2485.63,3029.53 2565.16,2950 TP3.1
  Top Layer w10: v1(2339.79,3077.22) 2339.79,3079.84 2355.32,3095.37 J1.A7 ; J1.A7@2356.88,3131.88 2384.84,3159.84 J1.B7 ; R8.1 v1(2400,3060)
  Bottom Layer w8: v1(2339.79,3077.22) 2357.01,3060 v1(2400,3060)
USB_P: J1.A6 J1.B6 R9.1 TP4.1 | length 514
  Top Layer w8: TP4.1 2194.84,2950 2274.37,3029.53 R9.1 2350,3053.72 2394.68,3098.4 J1.A6 ; v1(2364.94,3239.94) 2364.94,3186.93 J1.B6
  Bottom Layer w8: v1(2364.94,3239.94) 2364.94,3202.42 2385,3182.35 2385,3131.46 2383.3,3129.76 2383.3,3123.17 v1(2381.06,3120.93)
XTAL1: C6.1 U1.5 Y1.1
XTAL2: C7.1 U1.6 Y1.3
pads on no net: J1. J1.1 J1.2 J1.A2 J1.A3 J1.A8 J1.A10 J1.A11 J1.B2 J1.B3 J1.B8 J1.B10 J1.B11 SW1.2 SW1.3 U1.1 U1.2 U1.7 U1.8 U1.10 U1.11 U1.23 U1.24 U1.28 U2.2 U2.7 U2.16

## Polygon pours and split planes (outlines as drawn)
XTAL1 on Top Layer "XTAL1_L01_P005" (solid, pour order 5): 2315,2195 2279.16,2230.84 2265.78,2294.22 2240,2320 2240,2380 2340,2480 2307.5,2512.5 2185,2390 2185,2305 2255,2235 2265,2235 2310,2190
XTAL2 on Top Layer "XTAL2_L01_P004" (solid, remove dead copper, pour order 4): 2057.5,2152.5 2088.01,2121.99 2151.02,2185 2240,2185 2250,2195 2280,2195 2300,2175 2305,2180 2260,2225 2230,2225 2180,2275
GND on Top Layer "GND" (solid, pour order 3): 3280,1891.29 3280,1615 3120,1455 3050,1455 3050,1655.87 3095,1711.13 3095,1888.78
5V on Top Layer "5V" (solid, pour order 2): 2745,1896.97 2745,1675 2965,1455 3035,1455 3035,1655.87 2968.37,1737.68 2968.37,1893.94
NetC12_1 on Top Layer "BTN_5V" (solid, pour order 0): 570,2175 565,2170 565,2105 620,2105 635,2090 635,2065 685,2065 685,2070 685,2175
GND on Int1 (GND) "Digital Ground Pour" (solid, pour order 7): 150,1700.05 150,2600.05 300,2750.05 1300,2750.05 2000,3450.05 1999.5,3449.5 2027,3477 2723,3477 3450,2750 4450,2750 4600,2600 4600,1700 4172.45,1272.45 2375,1272.45 2375,1272.5 577.55,1272.5
GND on Int1 (GND) "Analog Ground" (solid, pour order 6): 2410,2200 2525,2315 2680,2315 3216.02,1788.48 3488.48,1788.48 3550.09,1850.09 3550.09,2750 4450,2750 4600,2600 4600.05,1700.05 4147.36,1272.5 3192.06,1272.5 3185.9,1474.1 3129.91,1530.09 3040.66,1530.09 3041.16,1554.75 2928.79,1556.21 2580,1905 2580,2025
GND on Int1 (GND) "GND_L02_P008" (solid, pour order 8): 2890,1549.38 2890,1410 3170,1410 3170,1550.4
5V on Int2 (PWR) "Power" (solid, pour order 9): 150,1700.05 150,2600.05 300,2750.05 1300,2750.05 2000,3450.05 1999.5,3449.5 2027,3477 2723,3477 3450,2750 4450,2750 4600,2600 4600,1700 4172.45,1272.45 2375,1272.45 2375,1272.5 577.55,1272.5

## Silkscreen, mask and mechanical layers (free items; w line width, h text height)
Top Overlay:
  drawing of 23 lines, arcs and shapes, not listed
  text "D+" at 1985.32,2929.68 h40
  text "D-" at 2705.32,2929.68 h40
  text "TX" at 2900,2755 h40
  text "RX" at 2910,2550 h40
  text "X" at 3380,2415 h40
  text "5V" at 3160,2110 h40
  text "BTN" at 1086.34,2107.68 h40
  text "GND" at 1510,2060 h40
  text "Y" at 3375,2040 h40
  text "ArcaDex v.1.0 / 9/13/2023" at 595.93,1710 h50
  text "MISO" at 2545,1570 h40
  text "RST" at 2010,1560 h40
  text "SCK" at 2055,1370 h40
  text "MOSI" at 2590,1370 h40
Mechanical 13:
  lines w10: 1999.5,3449.5 2027,3477 2723,3477 3450,2750 4450,2750 4600,2600 4600,1700 4172.45,1272.45 2375,1272.45 ; 2000,3450.05 1300,2750.05 300,2750.05 150,2600.05 150,1700.05 577.55,1272.5 2375,1272.5

## Text inside footprints (layer, text, board x,y; h text height)
P2: Top Overlay "5" at 2275.39,1597.94 h39.37 r180; Top Overlay "1" at 2487.99,1597.94 h39.37 r180